# Altium PCB USB-RS485.PcbDoc
Units mm, origin at the board's own origin, x right, y up, seen from the top; angles counter-clockwise.
Board outline 152.4 x 101.6 mm, 2 copper layers (Top Layer, Bottom Layer); 54 components, 42 nets, 217 pads, 16 vias.
Unrouted connection lines stored in the file: 74.
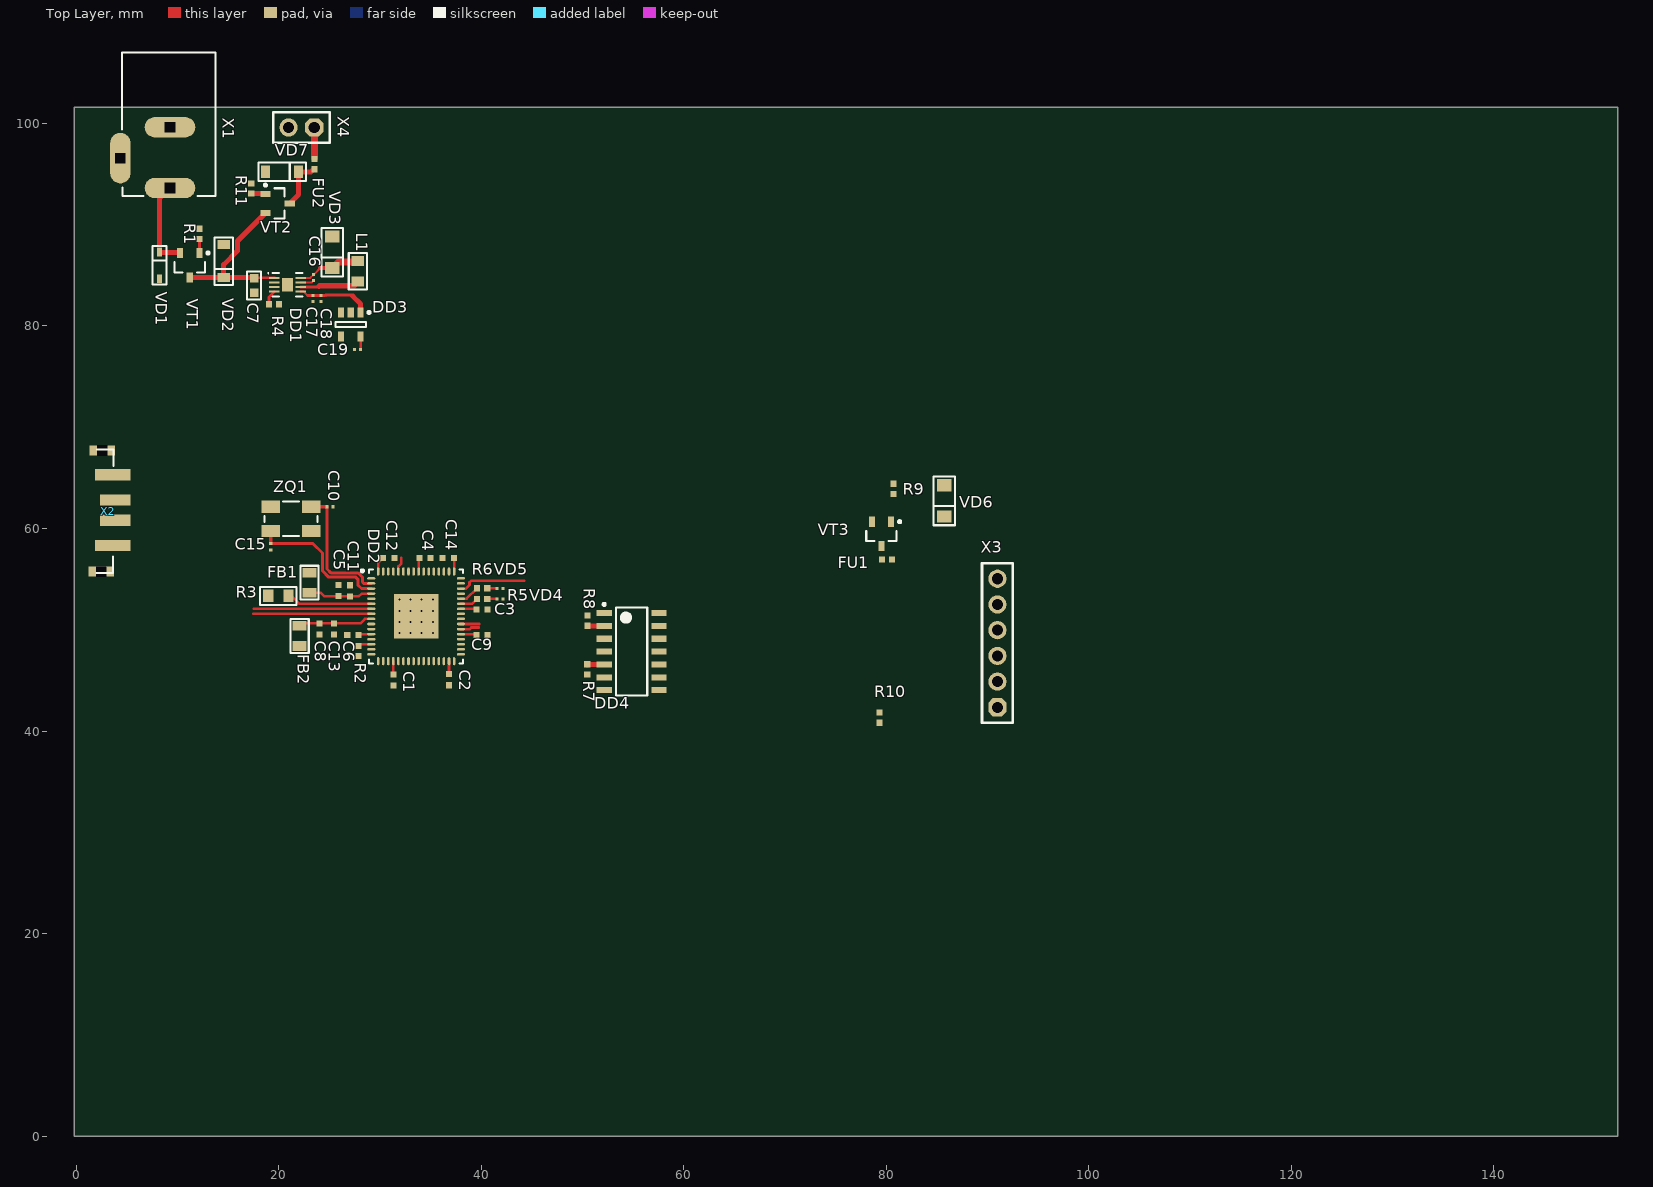
[diagram p0: Top Layer view]
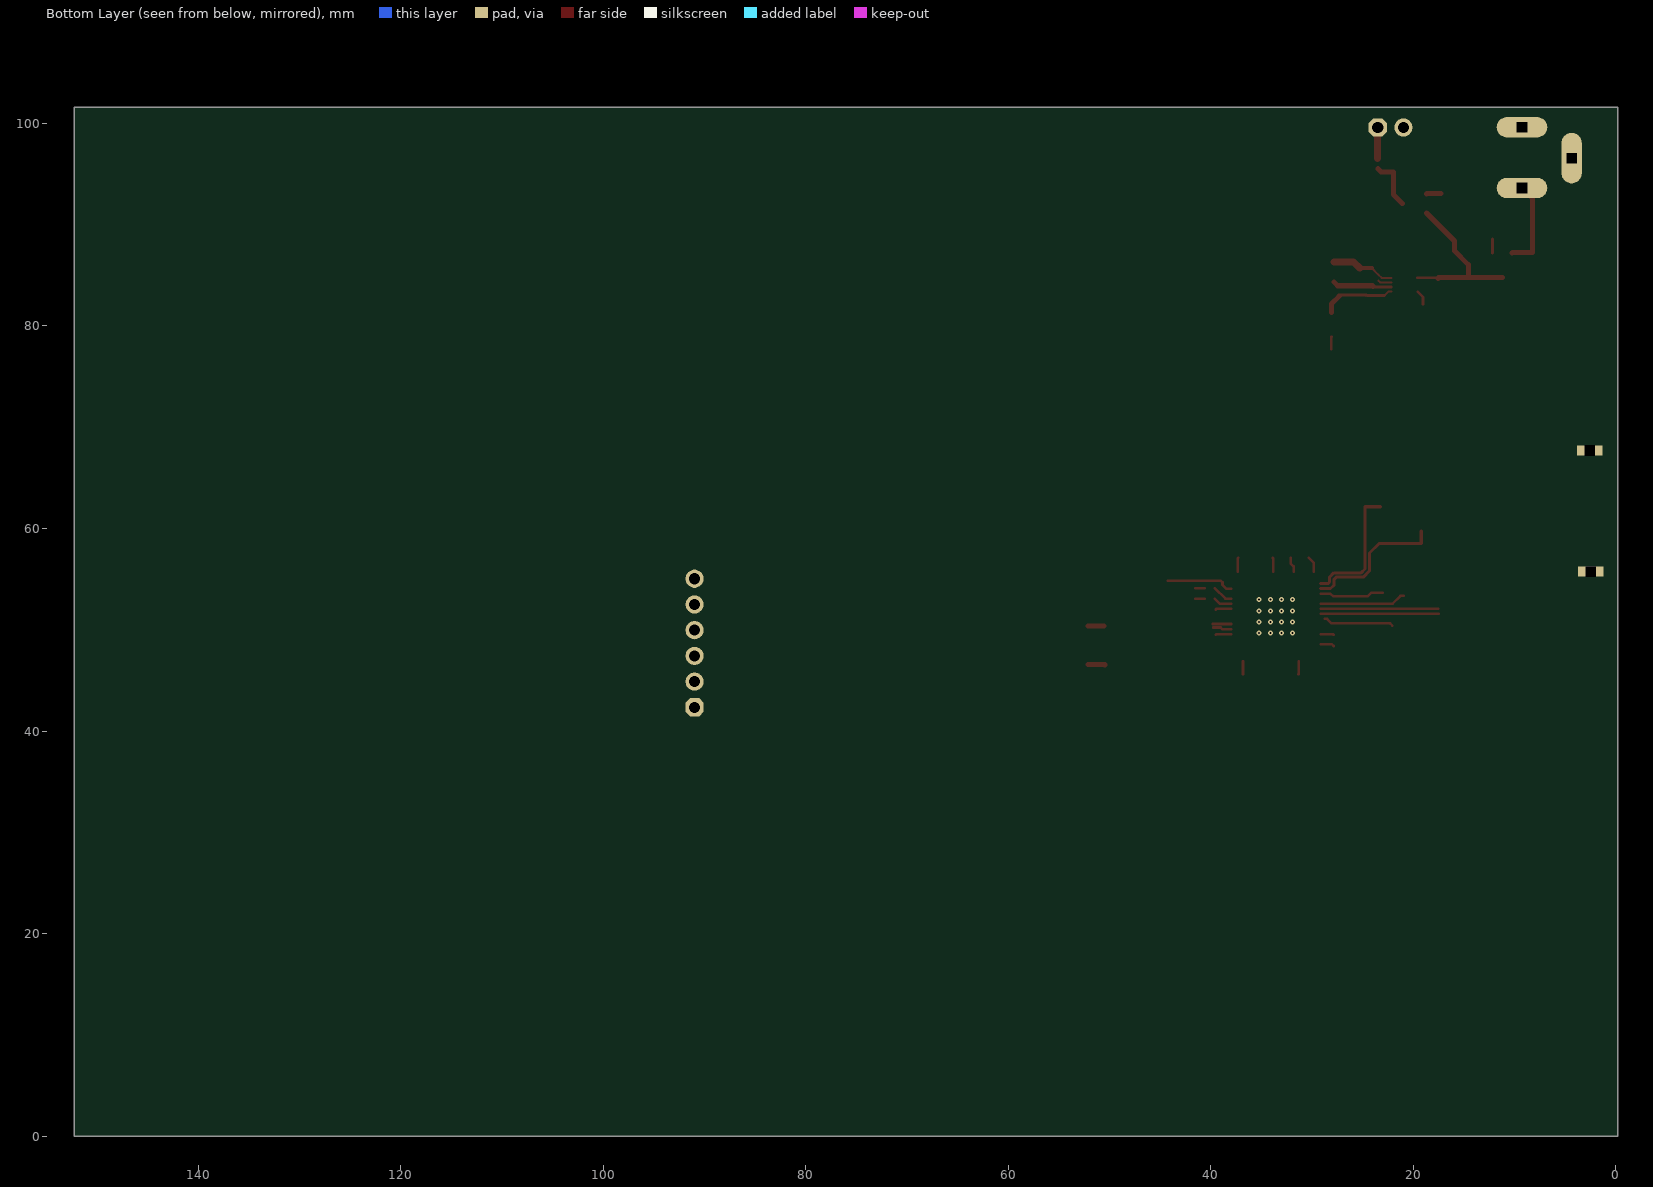
[diagram p1: Bottom Layer view, seen from below]

## Layer stack, top to bottom
Top Solder: solder mask 0.0102, Solder Resist, Dk 3.5
Top Layer: signal copper 0.0356
Dielectric 1: dielectric 0.32, FR-4, Dk 4.8
Bottom Layer: signal copper 0.0356
Bottom Solder: solder mask 0.0102, Solder Resist, Dk 3.5

## Board outline
-0.175,-0.025 152.225,-0.025 152.225,101.575 -0.175,101.575

## Design rules (kind name [scope] priority, off if disabled: settings)
Clearance [All] p1: gap=0.254 ignorepadtopadclearanceinfootprint=FALSE except(0: Arc-Hole Track-Hole SMDPad-Hole THPad-Hole Via-Hole Fill-Hole Poly-Hole Region-Hole Text-Hole)
PolygonConnect [All] p1: connectstyle=Relief reliefconductorwidth=0.254 reliefentries=4 polygonreliefangle="90 Angle" airgapwidth=0.254
RoutingVias [All] p1: holewidth=0.711 width=1.27 viastyle="Through Hole" minholewidth=0.711 minwidth=1.27 maxholewidth=0.711 maxwidth=1.27
SolderMaskExpansion [All] p1: expansion=0.102
Width +5V [InNet('+5В')] p1: maxlimit=1 minlimit=0.25 preferedwidth=0.25
Width gnd [InNet('GND')] p2: maxlimit=1 minlimit=0.3 preferedwidth=0.3
Width [All] p3: maxlimit=1 minlimit=0.25 preferedwidth=0.3
30 further rules are at their usual default settings.

## Components (designator, comment, footprint, x,y, rotation, side; value= is the part's Value field where it differs from the comment)
C1 "Capacitor" CH0402C 31.35,45.05 r270 top
C2 "Capacitor" CH0402C 36.825,45.075 r270 top
C3 "Capacitor" CH0402C 40.075,52 r0 top
C4 "Capacitor" CH0402C 34.45,57.1 r0 top
C5 "Capacitor" CH0402C 25.9,53.875 r90 top
C6 "Capacitor" CH0402C 27.325,49.5 r180 top
C7 "Capacitor" CH0603C 17.575,84 r270 top
C8 "Capacitor" CH0402C 24.05,50.075 r270 top
C9 "Capacitor" CH0402C 40.075,49.5 r0 top
C10 "Capacitor" CH0201C 25.075,62.15 r0 top
C11 "Capacitor" CH0402C 27.05,53.85 r90 top
C12 "Capacitor" CH0402C 30.875,57.1 r0 top
C13 "Capacitor" CH0402C 25.45,50.075 r270 top
C14 "Capacitor" CH0402C 36.75,57.1 r180 top
C15 "Capacitor" CH0201C 19.225,58.2 r270 top
C16 "Capacitor" CH0201C 23.45,84.775 r90 top
C17 "Capacitor" CH0201C 23.4,82.7 r270 top
C18 "Capacitor" CH0201C 24.2,82.7 r270 top
C19 "Capacitor" CH0201C 27.8,77.7 r180 top
DD1 "LT3653" LT3653 20.875,84.075 r0 top
DD2 "FT4232H" FT4232 33.575,51.325 r0 top
DD3 "TLV755P" SOT23-5 27.125,80.15 r270 top
DD4 "ZT3491" ZT3485E 54.85,47.85 r0 top
FB1 "Ferrite bead" CH0805F 23.05,54.65 r270 top
FB2 "Ferrite bead" CH0805F 22.075,49.4 r90 top
FU1 "Fuse" CH0402R 80.075,56.925 r180 top value=200мА
FU2 "Fuse" CH0402R 23.55,95.975 r90 top value=200мА
L1 "Inductor" CH0805L 27.825,85.4 r270 top
R1 "Res_0.125" CH0402R 12.2,89.1 r270 top
R2 "Res_0.125" CH0402R 27.875,47.9 r270 top
R3 "Res_0.125" CH0805R 19.975,53.35 r0 top
R4 "Res_0.125" CH0402R 19.55,82.15 r180 top
R5 "Res_0.125" CH0402R 40.1,53.05 r0 top
R6 "Res_0.125" CH0402R 40.1,54.1 r0 top
R7 "Res_0.125" CH0402R 50.475,46.1 r270 top
R8 "Res_0.125" CH0402R 50.5,50.9 r90 top
R9 "Res_0.125" CH0402R 80.725,63.925 r270 top
R10 "Res_0.125" CH0402R 79.325,41.325 r90 top
R11 "Res_0.125" CH0402R 17.3,93.575 r270 top
VD1 "TVS-diod_simmetrical" SOD323 8.25,85.975 r90 top
VD2 "Diod Zener" SOD123 14.575,88.05 r270 top
VD3 "TVS-diod_directed" SOD123W 25.3,87.275 r270 top
VD4 "Light_diod" CH0201L 41.85,53.05 r180 top
VD5 "Light_diod" CH0201L 41.85,54.1 r180 top
VD6 "TVS-diod_directed" SOD123W 85.725,62.725 r270 top
VD7 "Diod Zener" SOD123 18.7,95.225 r0 top
VT1 "P-Channel" SOT23_132 11.225,86 r270 top
VT2 "P-Channel" SOT23_132 19.9,92.1 r0 top
VT3 "*" SOT23_132 79.525,59.475 r270 top
X1 "2_pins" "CON: 163-179PH-EX" 9.275,107.325 r270 top
X2 "USB 2.0" USB 3.875,61.825 r0 top
X3 "Full_Duplex_RS485" "CON: PBS-6" 90.975,48.695 r90 top
X4 "2_pins" "CON: PBS-2" 22.255,99.6 r180 top
ZQ1 "Oscillator" "OSC: 5032" 21.225,60.95 r180 top value=12МГц

## Footprints (in the part's own frame and the unit in brackets; to place one, negate y for a bottom-side part, rotate by r counter-clockwise, add the part's x,y. Pads: shape width x height; smd on the part's side, far side on the other; paste and mask are expansions set on the pad)
CH0201C [mm]
  rect 0.3x0.3 smd: 1(-0.3,0) 2(0.3,0)
  body extent -0.3,-0.15 0.3,0.15, height 0.31
CH0201L [mm]
  rect 0.3x0.3 smd: 1(-0.3,0) 2(0.3,0)
  body extent -0.3,-0.15 0.3,0.15, height 0.3
CH0402C [mm]
  rect 0.6x0.6 smd: 1(-0.55,0) 2(0.55,0)
  body extent -0.51,-0.25 0.51,0.25, height 0.51
CH0402R [mm]
  rect 0.6x0.6 smd: 1(-0.5,0) 2(0.5,0)
  body extent -0.52,-0.25 0.47,0.25, height 0.34
CH0603C [mm] "Chip Capacitor, 2-Leads, Body 1,53x0,85mm, IPC Medium Density"
  rect 0.85x0.85 smd: 1(-0.7,0) 2(0.7,0)
  silkscreen extent -1.4,-0.7 1.4,0.7, body extent -0.8,-0.4 0.8,0.4, height 0.3
CH0805F [mm]
  rect 0.95x1.4 smd: 1(-1,0) 2(1,0)
  silkscreen extent -1.68,-0.9 1.67,0.9, body extent -1,-0.63 1,0.62, height 0.5
CH0805L [mm]
  rect 1x1.25 smd: 1(-1,0) 2(1,0)
  silkscreen extent -1.8,-0.9 1.8,0.9, body extent -1,-0.62 1,0.63, height 0.85
CH0805R [mm]
  rect 1x1.25 smd: 1(-1,0) 2(1,0)
  silkscreen extent -1.8,-0.9 1.8,0.9, body extent -1,-0.6 1,0.6, height 0.44
"CON: 163-179PH-EX" [mm]
  oval 2x5 hole 1 square: 1(13.7,0) 2(7.7,0)
  oval 5x2 hole 1 square: 2(10.75,-4.9)
  round 0.5 on Mech1: ""(14,-3)
  silkscreen extent 0.3,-4.72 14.5,4.5, body extent 0,-5 14.4,4.4, height 11.05
"CON: PBS-2" [mm] "PBS-2"
  oct 1.8x1.8 hole 1.1: 1(-1.27,0)
  round 1.8 hole 1.1: 2(1.27,0)
  silkscreen extent -2.79,-1.52 2.79,1.52
"CON: PBS-6" [mm] "PBS-6"
  oct 1.8x1.8 hole 1.1: 1(-6.35,0)
  round 1.8 hole 1.1: 2(-3.81,0) 3(-1.27,0) 4(1.27,0) 5(3.81,0) 6(6.35,0)
  silkscreen extent -7.87,-1.52 7.87,1.52
FT4232 [mm] "QFN-64 9x9"
  oval 0.8x0.25 smd: 1(-4.425,3.75) 2(-4.425,3.25) 3(-4.425,2.75) 4(-4.425,2.25) 5(-4.425,1.75) 6(-4.425,1.25) 7(-4.425,0.75) 8(-4.425,0.25) 9(-4.425,-0.25) 10(-4.425,-0.75) 11(-4.425,-1.25) 12(-4.425,-1.75) 13(-4.425,-2.25) 14(-4.425,-2.75) 15(-4.425,-3.25) 16(-4.425,-3.75) 33(4.425,-3.75) 34(4.425,-3.25) 35(4.425,-2.75) 36(4.425,-2.25) 37(4.425,-1.75) 38(4.425,-1.25) 39(4.425,-0.75) 40(4.425,-0.25) 41(4.425,0.25) 42(4.425,0.75) 43(4.425,1.25) 44(4.425,1.75) 45(4.425,2.25) 46(4.425,2.75) 47(4.425,3.25) 48(4.425,3.75)
  oval 0.25x0.8 smd: 17(-3.75,-4.425) 18(-3.25,-4.425) 19(-2.75,-4.425) 20(-2.25,-4.425) 21(-1.75,-4.425) 22(-1.25,-4.425) 23(-0.75,-4.425) 24(-0.25,-4.425) 25(0.25,-4.425) 26(0.75,-4.425) 27(1.25,-4.425) 28(1.75,-4.425) 29(2.25,-4.425) 30(2.75,-4.425) 31(3.25,-4.425) 32(3.75,-4.425) 49(3.75,4.425) 50(3.25,4.425) 51(2.75,4.425) 52(2.25,4.425) 53(1.75,4.425) 54(1.25,4.425) 55(0.75,4.425) 56(0.25,4.425) 57(-0.25,4.425) 58(-0.75,4.425) 59(-1.25,4.425) 60(-1.75,4.425) 61(-2.25,4.425) 62(-2.75,4.425) 63(-3.25,4.425) 64(-3.75,4.425)
  rect 4.4x4.4 smd: 65(0,0)
  silkscreen extent -5.42,-4.65 4.65,4.65, body extent -4.55,-4.55 4.55,4.55, height 0.9
LT3653 [mm] "SON, 8-Leads, Body 2,00x3,00mm, Pitch 0,45mm, Thermal Pad 1,35x1,12mm, IPC Medium Density"
  rect 1x0.2 smd: 1(-1.31,0.675) 2(-1.31,0.225) 3(-1.31,-0.225) 4(-1.31,-0.675) 5(1.31,-0.675) 6(1.31,-0.225) 7(1.31,0.225) 8(1.31,0.675)
  rect 1.12x1.35 smd: 9(0,0)
  silkscreen extent -1.95,-1.15 1.5,1.2, body extent -1.55,-1 1.55,1, height 0.8
"OSC: 5032" [mm]
  round 0.5 on Top Overlay: 1(-2.6,-2.2)
  rect 1.8x1.2 smd: 1(-2,-1.2) 2(2,-1.2) 3(2,1.2) 4(-2,1.2)
  round 0.5 on Mech1: ""(-2,-1.1)
  silkscreen extent -2.6,-1.7 2.6,1.7, body extent -2.5,-1.59 2.5,1.59, height 1.1
SOD123 [mm]
  rect 0.91x1.22 smd: 1(0,0) 2(3.275,0)
  round 0.5 on Mech1: 4(3,0.4)
  silkscreen extent -0.7,-0.9 4,0.9, body extent -0.25,-0.8 3.45,0.8, height 1.25
SOD123W [mm]
  rect 1.2x1.4 smd: 1(-1.55,0) 2(1.55,0)
  silkscreen extent -2.4,-1.05 2.4,1.05, body extent -2,-0.95 2,0.95, height 1.1
SOD323 [mm]
  rect 0.85x0.5 smd: 1(-1.3,0) 2(1.3,0)
  round 0.5 on Mech1: 5(0.7,0.2)
  silkscreen extent -1.9,-0.7 1.9,0.7, body extent -1.15,-0.6 1.15,0.6, height 1.04
SOT23-5 [mm] "SOT23, 5-Leads, Body 2,90x2,80mm, Pitch 0,95mm, IPC Medium Density"
  rect 1x0.6 smd: 1(-1.2,0.95) 2(-1.2,0) 3(-1.2,-0.95) 4(1.2,-0.95) 5(1.2,0.95)
  round 0.5 on Mech1: ""(-1.1,1.1)
  silkscreen extent -1.32,-1.5 0.25,1.93, body extent -1.5,-1.5 1.5,1.5, height 1.3
SOT23_132 [mm] "SOT23, 3-Leads, Body 3,0x2,6mm (max), Pitch 0,95mm, IPC Medium Density"
  rect 1x0.6 smd: 1(-1.2,0.95) 2(-1.2,-0.95) 3(1.2,0)
  round 0.5 on Mech1: ""(-0.9,1.1)
  silkscreen extent -1.32,-1.5 0.7,1.92, body extent -1.32,-1.52 1.32,1.52, height 1.12
USB [mm]
  rect 3.5x1.12 smd: 1(-0.25,3.5) 4(-0.25,-3.5)
  rect 3x1.12 smd: 2(0,1) 3(0,-1)
  rect 2.5x1 hole 1 square: 10(-1.375,-6.075) 10(-1.3,5.875)
  silkscreen extent -1.88,-6.2 -0.2,6, body extent -19,-6.4 1.3,6.2, height 3.2
ZT3485E [mm] "SOIC, 14-Leads, Body 8,65x3,90mm, Pitch 1,27mm, IPC Medium Density"
  rect 1.5x0.6 smd: 1(-2.7,3.81) 2(-2.7,2.54) 3(-2.7,1.27) 4(-2.7,0) 5(-2.7,-1.27) 6(-2.7,-2.54) 7(-2.7,-3.81) 8(2.7,-3.81) 9(2.7,-2.54) 10(2.7,-1.27) 11(2.7,0) 12(2.7,1.27) 13(2.7,2.54) 14(2.7,3.81)
  silkscreen extent -2.82,-4.35 1.55,4.78, body extent -3,-4.35 3,4.35, height 1.6

## Part data
C1 C2 C3 C4 C6 C9 C11 C12 C13: Capacitance=0,1мк, Case=0402, Manufacture=AVX, Voltage=10В, HelpURL=https://ru.mouser.com/ProductDetail/AVX/0402ZD103KAT2A?qs=sGAEpiMZZMs0AnBnWHyRQKdiqyDPVQdAu74W%2fwwRq8A%3d, Model=0402ZD103KAT2A
C5 C8: Capacitance=4,7мк, Case=0402, Manufacture="Murata Electronics", Voltage=10В, HelpURL=https://ru.mouser.com/ProductDetail/Murata-Electronics/ZRB15XR61A475KE01D?qs=sGAEpiMZZMs0AnBnWHyRQO9VYadaKTO%252beZnE9zFUsbv4FmCibz4ZfQ%3d%3d, Model=ZRB15XR61A475KE01D
C7: Capacitance=4,7мк, Case=0603, Manufacture=TDK, Voltage=35В, HelpURL=https://ru.mouser.com/ProductDetail/TDK/C1608JB1V475M080AC?qs=sGAEpiMZZMs0AnBnWHyRQFv7x1xn%252bYFd6VAPnwlpyGEmZrVGUJGxTQ%3d%3d, Model=C1608JB1V475M080AC
C10 C15: Capacitance=30, Case=0201, Manufacture=KEMET, Voltage=10В, HelpURL=https://ru.mouser.com/ProductDetail/KEMET/CBR02C308B8GAC?qs=sGAEpiMZZMs0AnBnWHyRQKJCfzG%2fi9wHnix1yOwfSPhOUzhoHh%252bTpQ%3d%3d, Model=CBR02C308B8GAC
C14: Capacitance=3,3мк, Case=0402, Manufacture=TDK, Voltage=6,3В, HelpURL=https://ru.mouser.com/ProductDetail/TDK/C1005X5R0J335M050BC?qs=sGAEpiMZZMs0AnBnWHyRQFzBYxg9rzNcvy5xMC7FxLU%3d, Model=C1005X5R0J335M050BC
C16 C17 C18 C19: Capacitance=1мк, Case=0201, Manufacture="Murata Electronics", Voltage=10В, HelpURL=https://ru.mouser.com/ProductDetail/Murata-Electronics/GRM033C81A105ME05E?qs=sGAEpiMZZMs0AnBnWHyRQN7%2fAA2D2lPPXfhIkJ3ChWM%252bNp28BKy3Ug%3d%3d, Model=GRM033C81A105ME05E
DD1: "7.5~30 to 5", Model=LT3653
DD2: "Ann", Case=QFN-64, Manufactere="FTDI, Future Technology Devices International Ltd", HelpURL=https://www.ftdichip.com/Products/ICs/FT4232H.htm, Model=FT4232H
DD3: library part "LDO +3.3V", Case=SOT-23, Manufacture="Texas Instruments", HelpURL=http://www.ti.com/product/TLV755P?keyMatch=TLV755P&tisearch=Search-EN-Everything, Model=TLV755P
DD4: "UART - RS485", Case=nSOIC-14, Manufacture=Zywyn, HelpURL=https://www.kynix.com/Detail/195117/ZT3483LEEN.html, Model=ZT3491
FB1 FB2: Case=0805, Manufacture=Laird, Max DC current=1,5А, HekpURL=https://www2.mouser.com/ProductDetail/Laird/MI0805K400R-10?qs=%2fha2pyFaduiHND%252bdjhHwYezPllDM7l6y0ARhTY4M0iGJeUtz%252byGA0A%3d%3d, Impedance=40Ом, Model=MI0805K400R-10
L1: Case=0805, Inductance=4,7мк, Manufacture=Panasonic, Max current=1А, HelpURL=https://ru.mouser.com/ProductDetail/Panasonic/ELG-TEA4R7NA?qs=sGAEpiMZZMsg%252by3WlYCkU%252bdHxGw%252bjF29VUqcX1cNOgM%3d, Impedance=300м, Model=ELG-TEA4R7NA
R1 R4 R5 R6 R7 R8 R9 R11: Case=0402, Manufacture=Yageo, HelpURL=https://ru.mouser.com/ProductDetail/Yageo/AC0402FR-7W10KL?qs=sGAEpiMZZMvdGkrng054txbN%2f5LBcxld3gyqgmBuiXRPLjwmdNqO3A%3d%3d, Impedance=10К, Model=AC0402FR-7W10KL
R2 R10: Case=0402, Manufacture="KOA Speer"
  R2: HelpURL=https://ru.mouser.com/ProductDetail/KOA-Speer/SG73P1ETTP1001F?qs=sGAEpiMZZMvdGkrng054t%2f16WM9J8YovCYtiWkW5%2faA%3d, Impedance=1К, Model=SG73P1ETTP1001F
  R10: HelpURL=https://ru.mouser.com/ProductDetail/KOA-Speer/SG73S1ETTP121J?qs=sGAEpiMZZMvdGkrng054t%2f16WM9J8YovbyvN2zYhrU8%3d, Impedance=120, Model=SG73S1ETTP121J
R3: Case=0805, Manufacture=Panasonic, HelpURL=https://ru.mouser.com/ProductDetail/Panasonic/ERJ-6GEYK126V?qs=sGAEpiMZZMvdGkrng054t67Efho1F8r6k%252bzuIF5xRYA%3d, Impedance=12К, Model=ERJ-6GEYK126V
VD1: Case=SOD-323P, Manufacturer="Torex Semiconductor", Thresh_Voltage=24В, HelpURL=https://ru.mouser.com/Semiconductors/Discrete-Semiconductors/Diodes-Rectifiers/TVS-Diodes-ESD-Suppressors/_/N-azknd?P=1z0z7ymZ1yzv44xZ1y95zfoZ1z0x69g&Ns=Package+%2f+Case%7c0, Model=XBP1012-G
VD3 VD6: Case=SOD-123W, Clamping_Voltage=8В, Manufacturer=Nexperia, HelpURL=https://ru.mouser.com/ProductDetail/Nexperia/PTVS3V3S1UTR115?qs=sGAEpiMZZMsItbzKdwyIe55sLWjhUV0FnMtsDZGUovc%3d, Model=PTVS3V3S1UTR,115
VD4: Color=Зелёный, Manufacture=Kingbright, Thresh_Voltage=1,97В, HelpURL=https://ru.mouser.com/ProductDetail/Kingbright/APG0603CGC-TT?qs=sGAEpiMZZMseGfSY3csMkWhaTYyynk7zmJSHZVA83x%252bt%2FzMFAtnBag%3D%3D, If=10мА, Model=APG0603CGC-TT
VD5: Color=Красный, Manufacture=Kingbright, Thresh_Voltage=1,97В, HelpURL=https://ru.mouser.com/ProductDetail/Kingbright/APG0603SURC-TT?qs=sGAEpiMZZMseGfSY3csMkWhaTYyynk7zWfpYoqHc%252biGwdyFqmyeODA%3D%3D, If=10мА, Model=APG0603SURC-TT
VT1 VT2: Manufacture="Diodes Incorporated", HelpURL=https://ru.mouser.com/ProductDetail/Diodes-Incorporated/DMP4065S-7?qs=sGAEpiMZZMshyDBzk1%2fWizUdW5KNcF83uXTduzoNpXIy82%252bBOlvohQ%3d%3d, id=3,4А, Model=DMP4065S-7, Vgs=1В, Vsd=40В
VT3: library part P-Channel, Manufacture="Vishay / Siliconix", HelpURL=https://ru.mouser.com/ProductDetail/Vishay-Siliconix/SI2329DS-T1-GE3?qs=sGAEpiMZZMshyDBzk1%2fWi0IfsQ3%2f3bgnEGeh9AiMdAo%3d, id=6А, Model=SI2329DS-T1-GE3, Vgs=350мВ, Vsd=8В
X2: library part USB-A, "USB", Manufacturer="TE Connectivity", ComponentKind="type A", HelpURL=https://www2.mouser.com/ProductDetail/Wurth-Electronics/629004113921?qs=35zkduByVmhHRkVkRjAlEQ==, Model=292303-2, Vcc=+5В
ZQ1: Manufacture="CTS Electronic Components", HelpURL=https://ru.mouser.com/ProductDetail/CTS-Electronic-Components/636L3I012M00000?qs=sGAEpiMZZMtldj7qu1ydrWzf7LKZ2EliIlXd3ltxwts%3d, Model=https://ru.mouser.com/ProductDetail/CTS-Electronic-Components/636L3I012M00000?qs=sGAEpiMZZMtldj7qu1ydrWzf7LKZ2EliIlXd3ltxwts%3d
FU1 FU2: HelpURL=https://www2.mouser.com/ProductDetail/Bourns/SF-0402FP020F-2?qs=sGAEpiMZZMtxU2g%2f1juGqWJziY9CkRY0v%252bd32oCrRTr%2fW8XqdHGjQA%3d%3d
X1: HelpURL=https://ru.farnell.com/gct-global-connector-technology/dcj250-10-a-k1-k/dc-power-jack-5a-20vdc-black/dp/2524130?st=power%20jack, Vcc=+24В
X3: A=A, B=B, HelpURL=https://ru.mouser.com/ProductDetail/Harwin/M50-3140645?qs=sGAEpiMZZMs%252bGHln7q6pm8Vn94ktop%2FJjOh82Azijbg9ipiItTiXHg%3D%3D, Vcc=+5В, Y=Y, Z=Z
X4: HelpURL=https://ru.mouser.com/ProductDetail/Harwin/M50-3140245R?qs=sGAEpiMZZMs%252bGHln7q6pm8Vn94ktop%2FJtmD0IM0sqjtMooR%2Fqw0FIA%3D%3D, Vcc=+24В

## Via types
v1: diameter 0.5, hole 0.2, Top Layer to Bottom Layer, 16 vias

## Nets (pads, with @x,y where several pads share a name; then routed paths per layer and width w, separated by ;. In a path a pad name is that pad's centre, name@x,y a point inside that pad or via, vN(x,y) a via of type N, cw(c..) or ccw(c..) an arc to the next point about the centre after c; other vN are vias at no path point)
+3,3В: DD2.50 FB1.1 FB2.1
+3.3В: C19.1 DD3.5 | length 1.3
  Top Layer w0.25: DD3.5 28.1,78.925 C19.1
+5В: C17.1 C18.1 DD1.5 DD3.1 DD4.14 R2.2 R7.2 R8.2 VD4.1 VD5.1 VT3.2 | length 7.3
  Top Layer w0.2: DD1.5 22.473,83.4 22.873,83
  Top Layer w0.3: 22.873,83 24.6,83 24.654,83.054 27.212,83.054 27.321,82.946
  Top Layer w0.5: 27.321,82.946 28.075,82.191 DD3.1
GND: C1.2 C2.2 C3.2 C4.2 C5.2 C6.2 C7.2 C8.2 C9.2 C10.2 C11.2 C12.2 C13.2 C14.2 C15.2 C17.2 C18.2 C19.2 DD1.9 DD2.1 DD2.5 DD2.10 DD2.11 DD2.13 DD2.15 DD2.25 DD2.35 DD2.47 DD2.51 DD3.2 DD4.6 DD4.7 R1.1 R3.1 R4.1 R9.2 R11.1 VD1.1 VD2.1 VD3.1 VD6.1 VD7.1 X1.2 X2.4 X3.6 X4.2
Link: DD4.9 R10.1 X3.5
NetC1_1: C1.1 DD2.20 | length 1.3
  Top Layer w0.254: DD2.20 31.325,45.625 C1.1
NetC2_1: C2.1 DD2.31 | length 1.3
  Top Layer w0.254: C2.1 DD2.31
NetC3_1: C3.1 DD2.42 | length 1.6
  Top Layer w0.254: DD2.42 39.45,52.075 C3.1
NetC4_1: C4.1 DD2.56 | length 1.4
  Top Layer w0.254: DD2.56 33.825,57.025 C4.1
NetC5_1: C5.1 C11.1 DD2.4 FB1.2 | length 6.3
  Top Layer w0.25: FB1.2 24.175,53.65 24.525,53.3 C11.1 27.9,53.3 28.225,53.575 DD2.4
NetC6_1: C6.1 C9.1 C12.1 C14.1 DD2.12 DD2.37 DD2.49 DD2.64 | length 5.8
  Top Layer w0.254: C6.1 27.95,49.575 DD2.12 ; DD2.64 29.825,56.6 C12.1 ; C14.1 37.325,57.075 DD2.49 ; DD2.37 39.45,49.575 C9.1
NetC7_1: C7.1 DD1.1 VD2.2 VT1.3 VT2.2 | length 16.6
  Top Layer w0.25: C7.1@17.575,84.754 DD1.1@19.615,84.754
  Top Layer w0.3: C7.1 C7.1@17.575,84.754
  Top Layer w0.5: VT1.3 14.55,84.8 VD2.2 ; C7.1 17.5,84.775 VD2.2 ; VT2.2 15.95,88.4 15.95,87.425 14.575,86.05 VD2.2
NetC8_1: C8.1 C13.1 DD2.9 FB2.2 | length 7
  Top Layer w0.25: FB2.2 22.3,50.625 25.025,50.625 ; 25.025,50.625 28.075,50.625 28.525,51.075 DD2.9@28.775,51.075
NetC10_1: C10.1 DD2.2 ZQ1.1@23.225,62.15 | length 13
  Top Layer w0.3: ZQ1.1@23.225,62.15 C10.1 24.775,56 25.15,55.625 27.85,55.625 28.275,55.2 28.275,54.7 28.4,54.575 DD2.2
NetC15_1: C15.1 DD2.3 ZQ1.3 | length 14.4
  Top Layer w0.3: ZQ1.3 C15.1 23.4,58.5 24.325,57.575 24.325,55.825 24.95,55.2 27.625,55.2 27.825,55 27.825,54.425 28.175,54.075 DD2.3
NetC16_1: C16.1 DD1.7 | length 1.3
  Top Layer w0.2: DD1.7 23.275,84.3 C16.1
NetC16_2: C16.2 DD1.8 L1.1 VD3.2 | length 6.3
  Top Layer w0.2: DD1.8 23.125,84.75 C16.2 24.1,85.725
  Top Layer w0.4: 24.1,85.725 VD3.2
  Top Layer w0.7: VD3.2 25.9,86.325 L1.1@27.825,86.325
NetDD1_4: DD1.4 R4.2 | length 1.4
  Top Layer w0.25: R4.2 19.05,82.856 DD1.4@19.565,83.371
NetDD1_6: DD1.6 L1.2 | length 5.6
  Top Layer w0.25: DD1.6 23.8,83.85
  Top Layer w0.5: 24,83.925 24.05,83.975 27.475,83.975 L1.2@27.825,84.325
NetDD2_6: DD2.6 R3.2 | length 8.5
  Top Layer w0.25: R3.2 21.275,53.35 22.05,52.575 DD2.6
NetDD2_7: DD2.7 X2.2 | length 11.6
  Top Layer w0.25: 17.55,52.075 DD2.7
NetDD2_8: DD2.8 X2.3 | length 11.7
  Top Layer w0.25: 17.475,51.575 DD2.8
NetDD2_14: DD2.14 R2.1 | length 1.3
  Top Layer w0.254: R2.1 28.05,48.575 DD2.14
NetDD2_38: DD2.38 DD4.5 R7.1 | length 3.5
  Top Layer w0.254: DD2.38 38.875,50.075 39.025,50.225 39.775,50.225
  Top Layer w0.5: R7.1@50.475,46.55 50.505,46.58 DD4.5
NetDD2_39: DD2.39 DD4.2 R8.1 | length 3.5
  Top Layer w0.254: DD2.39 39.8,50.575 ; R8.1@50.5,50.45 R8.1@50.56,50.39
  Top Layer w0.5: R8.1@50.56,50.39 DD4.2
NetDD2_43: DD2.43 R5.1 | length 1.8
  Top Layer w0.254: DD2.43 39.125,52.575 R5.1
NetDD2_44: DD2.44 R6.1 | length 2
  Top Layer w0.254: DD2.44 38.575,53.075 R6.1
NetDD2_46: DD2.46 DD4.4 | length 6.7
  Top Layer w0.25: DD2.46 38.5,54.075 38.85,54.425 38.85,54.675 39,54.825 44.25,54.825
NetDD2_60: DD2.60 DD4.3 | length 1.5
  Top Layer w0.25: DD2.60 31.825,56.25 32.125,56.55 32.125,57.125
NetDD4_10: DD4.10 R10.2 X3.4
NetDD4_11: DD4.11 X3.3
NetDD4_12: DD4.12 X3.2
NetFU1_1: FU1.1 X3.1
NetFU1_2: FU1.2 VD6.2 VT3.3
NetFU2_1: FU2.1 VD7.2 VT2.3 | length 5.1
  Top Layer w0.5: VT2.3 21.975,92.975 VD7.2 23.2,95.225 FU2.1@23.5,95.525
NetFU2_2: FU2.2 X4.1 | length 3
  Top Layer w0.7: FU2.2@23.525,96.55 X4.1
NetR1_2: R1.2 VT1.1 | length 1.4
  Top Layer w0.3: VT1.1 12.2,87.225 R1.2
NetR5_2: R5.2 VD4.2 | length 1
  Top Layer w0.254: R5.2 VD4.2
NetR6_2: R6.2 VD5.2 | length 1
  Top Layer w0.254: R6.2 VD5.2
NetR9_1: R9.1 VT3.1
NetR11_2: R11.2 VT2.1 | length 1.4
  Top Layer w0.5: R11.2 18.675,93.075 VT2.1
NetVD1_2: VD1.2 VT1.2 X1.1 | length 8.8
  Top Layer w0.5: X1.1 8.25,92.6 VD1.2 10.2,87.275 VT1.2
pads on no net: DD1.2 DD1.3 DD2.16 DD2.17 DD2.18 DD2.19 DD2.21 DD2.22 DD2.23 DD2.24 DD2.26 DD2.27 DD2.28 DD2.29 DD2.30 DD2.32 DD2.33 DD2.34 DD2.36 DD2.40 DD2.41 DD2.45 DD2.48 DD2.52 DD2.53 DD2.54 DD2.55 DD2.57 DD2.58 DD2.59 DD2.61 DD2.62 DD2.63 DD2.65 DD3. DD3.3 DD3.4 DD4.1 DD4.8 DD4.13 VD1.5 VD2.4 VD7.4 VT1. VT2. VT3. X1. X2.1 X2.10 ZQ1. ZQ1.1@23.825,63.15 ZQ1.2 ZQ1.4
copper on no net:
  other v1: 31.925,49.675 33.025,49.675 34.125,49.675 35.225,49.675 31.925,50.775 33.025,50.775 34.125,50.775 35.225,50.775 31.925,51.875 33.025,51.875 34.125,51.875 35.225,51.875 31.925,52.975 33.025,52.975 34.125,52.975 35.225,52.975